# Altium PCB PCB_5_Braco_so_motores.PcbDoc
Units mm, origin at the board's own origin, x right, y up, seen from the top; angles counter-clockwise.
Board outline 97 x 148.5 mm, 2 copper layers (Top Layer, Bottom Layer); 75 components, 78 nets, 227 pads, 19 vias.
Unrouted connection lines stored in the file: 1.
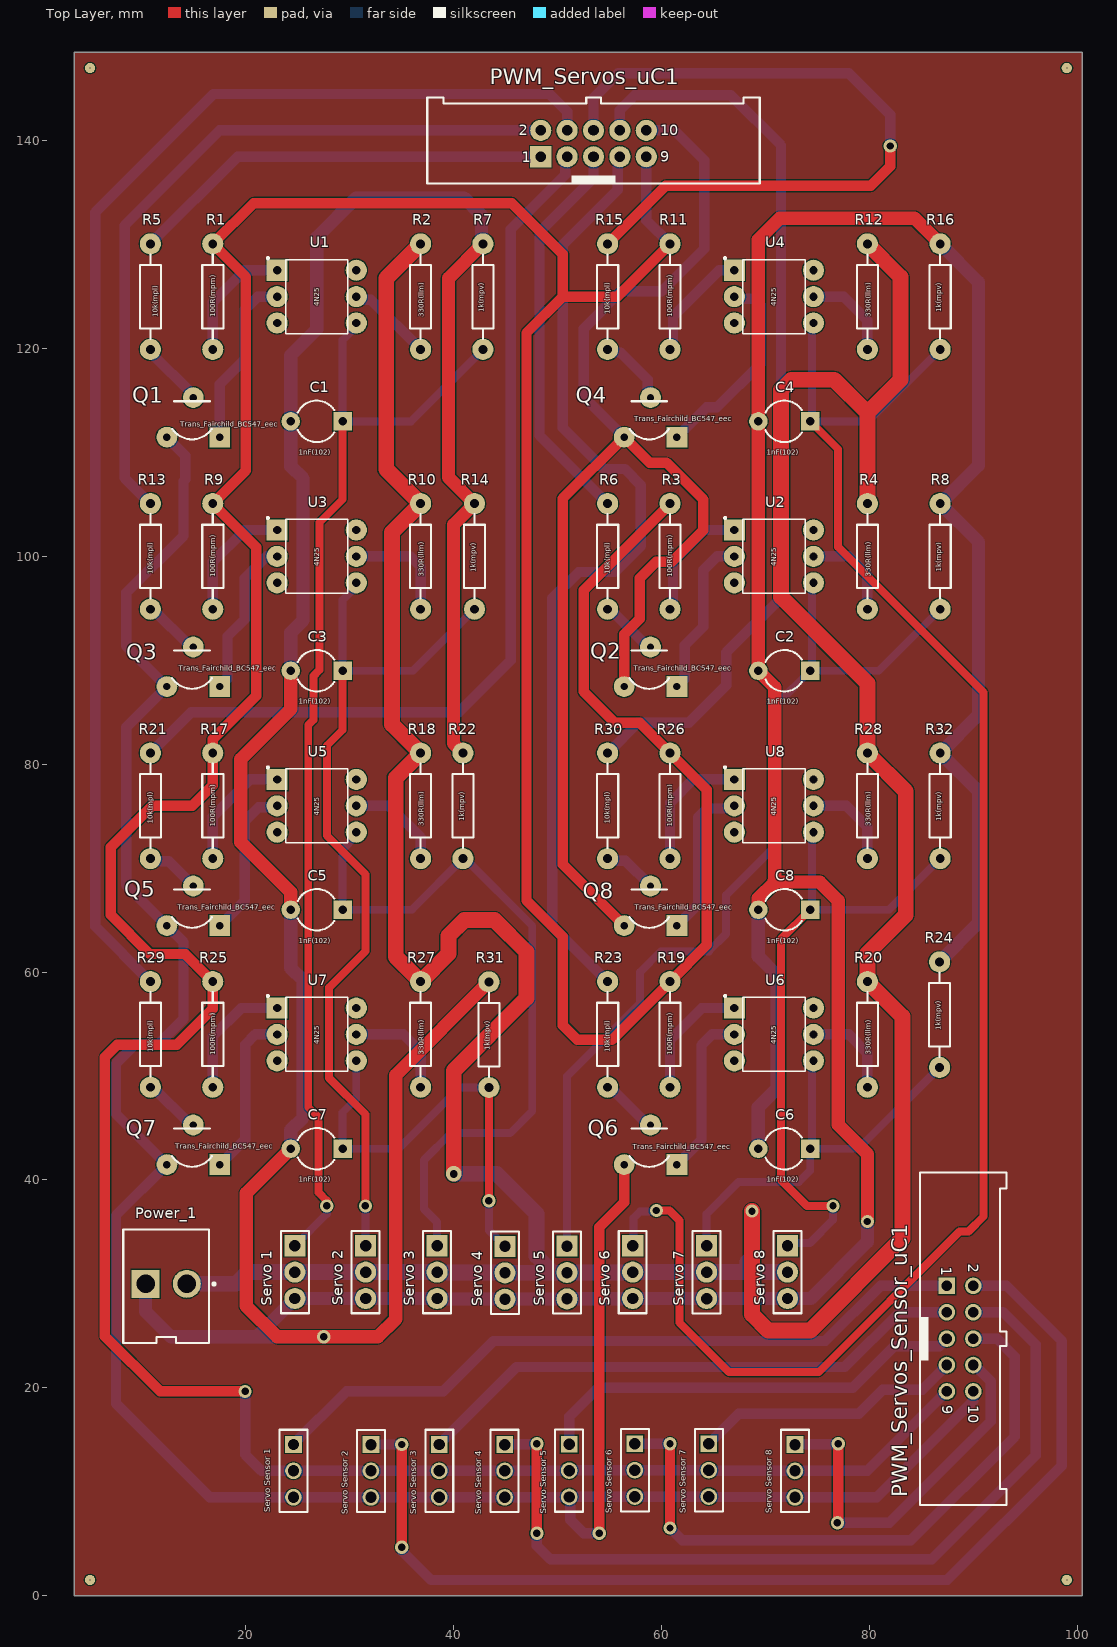
[diagram p0: Top Layer view]
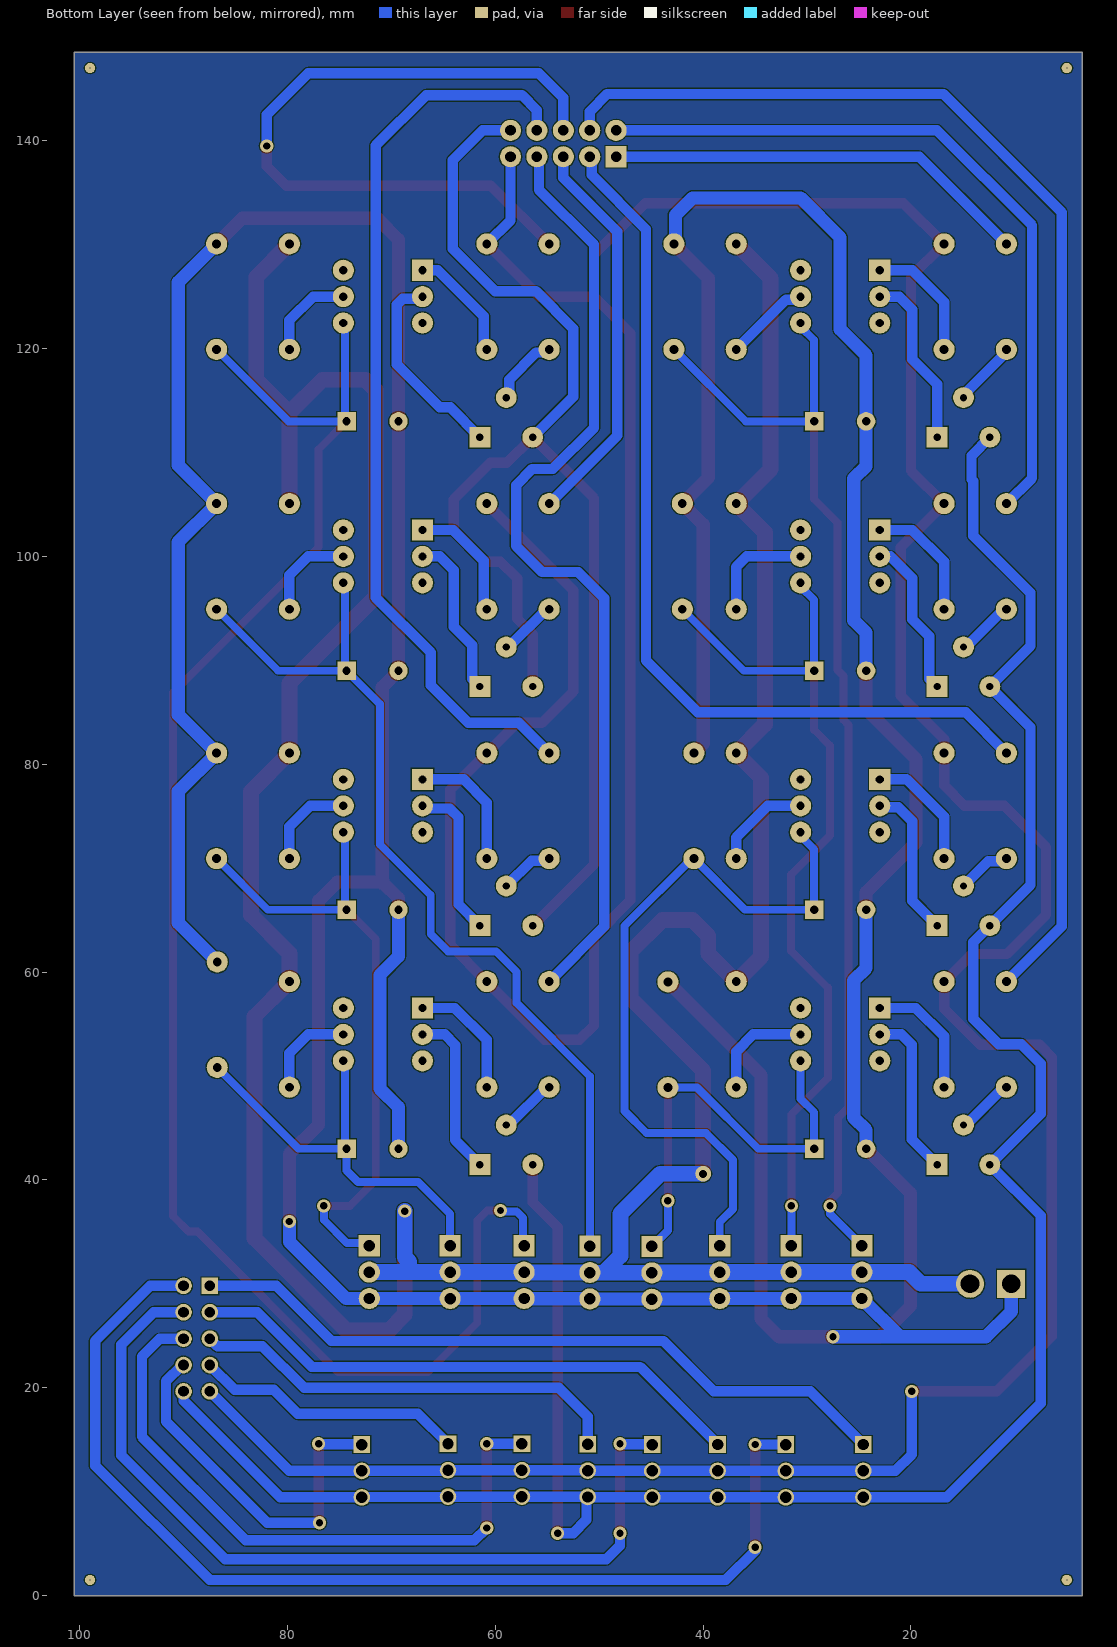
[diagram p1: Bottom Layer view, seen from below]
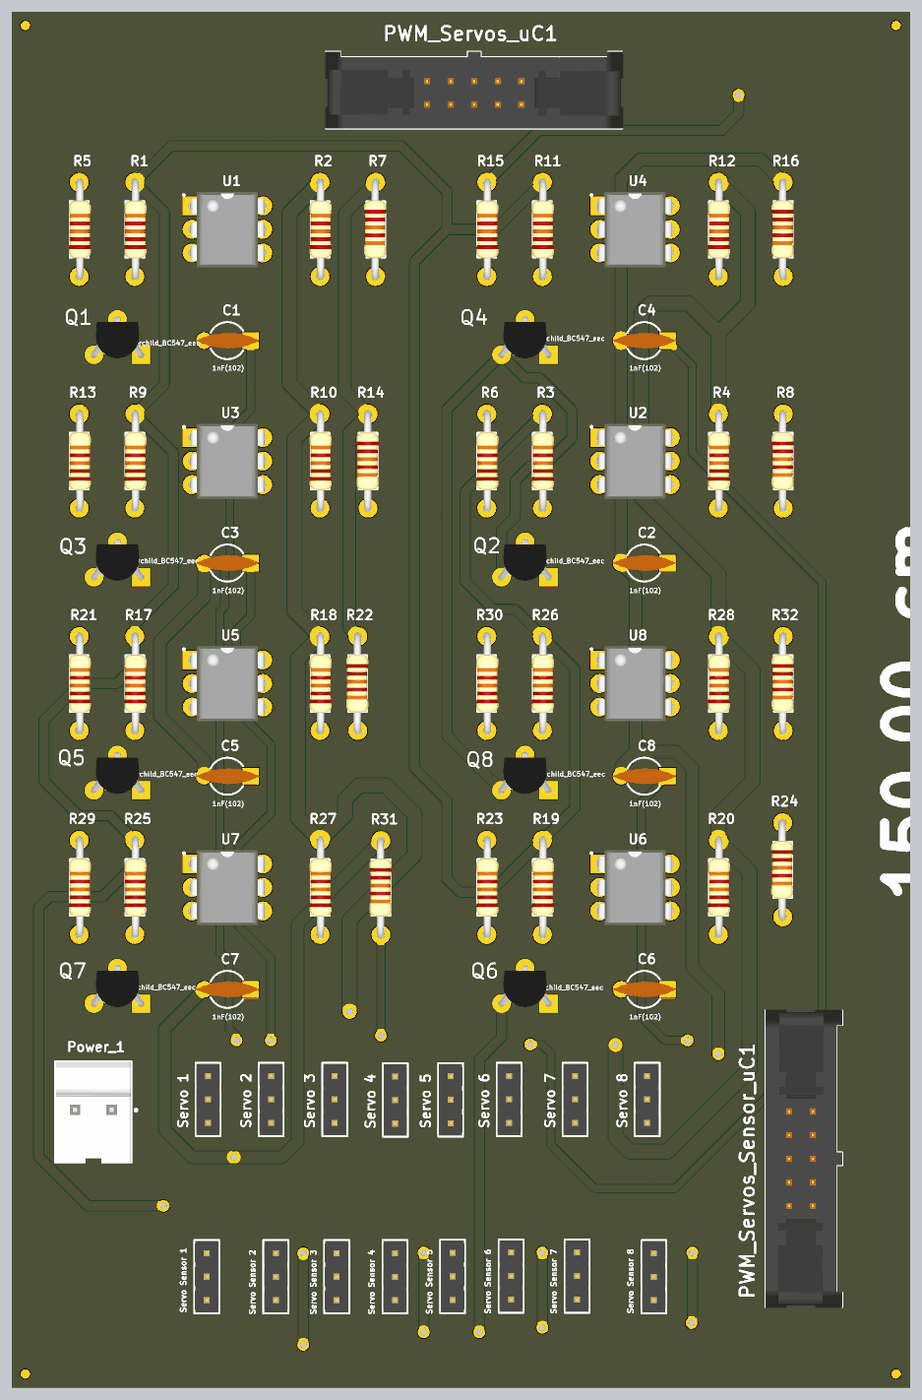
[diagram p2: 3D render of the assembled board from above, using the file's embedded part models]

## Layer stack, top to bottom
Top Solder: solder mask 0.0102, Solder Resist, Dk 3.5
Top Layer: signal copper 0.0356
Dielectric 1: dielectric 0.32, FR-4, Dk 4.8
Bottom Layer: signal copper 0.0356
Bottom Solder: solder mask 0.0102, Solder Resist, Dk 3.5

## Board outline
100.5,148.5 100.5,0 3.5,0 3.5,148.5

## Design rules (kind name [scope] priority, off if disabled: settings)
Clearance [All] p1: gap=0.1 ignorepadtopadclearanceinfootprint=FALSE except(0: Arc-Hole Track-Hole SMDPad-Hole THPad-Hole Via-Hole Fill-Hole Poly-Hole Region-Hole Text-Hole; 0.254: Arc-SMDPad Arc-THPad Arc-Via Arc-Text Track-SMDPad Track-THPad Track-Via Track-Text SMDPad-SMDPad SMDPad-THPad SMDPad-Via SMDPad-Text THPad-THPad THPad-Via THPad-Text Via-Via Via-Text Fill-Text Poly-Text Region-Text Text-Text)
ParallelSegment [All] p1: limit=800.217 gap=0.25
PolygonConnect [All] p1: connectstyle=Relief reliefconductorwidth=0.254 reliefentries=4 polygonreliefangle="90 Angle" airgapwidth=0.254
RoutingCorners [All] p1: cornerstyle=45-Degree minsetback=5.08 maxsetback=2.54
RoutingPriority [OnLayer('Bottom Layer')] p1: routingpriority=6
RoutingVias [All] p1: holewidth=0.711 width=1.57 viastyle="Through Hole" minholewidth=0.711 minwidth=1.27 maxholewidth=0.711 maxwidth=1.67
SolderMaskExpansion [All] p1: expansion=0.102
UnRoutedNet [All] p1: checkbadconnections=TRUE
Width "Schematic Width Constraint_9" [InNet('GND_8V')] p1: maxlimit=1.27 minlimit=1.27 preferedwidth=1.27
Width "Schematic Width Constraint_7" [InNet('Servo_2')] p2: maxlimit=0.762 minlimit=0.762 preferedwidth=0.762
Width "Schematic Width Constraint_6" [InNet('Servo_3')] p3: maxlimit=0.762 minlimit=0.762 preferedwidth=0.762
Width "Schematic Width Constraint_5" [InNet('Servo_4')] p4: maxlimit=0.762 minlimit=0.762 preferedwidth=0.762
Width "Schematic Width Constraint_4" [InNet('Servo_5')] p5: maxlimit=0.762 minlimit=0.762 preferedwidth=0.762
Width "Schematic Width Constraint_3" [InNet('Servo_6')] p6: maxlimit=0.762 minlimit=0.762 preferedwidth=0.762
Width "Schematic Width Constraint_2" [InNet('Servo_8')] p7: maxlimit=0.762 minlimit=0.762 preferedwidth=0.762
Width "Schematic Width Constraint_1" [InNet('Servo_7')] p8: maxlimit=0.762 minlimit=0.762 preferedwidth=0.762
Width "Schematic Width Constraint_8" [InNet('Servo_1')] p9: maxlimit=0.762 minlimit=0.762 preferedwidth=0.762
Width "Schematic Width Constraint" [InNet('VCC_8V')] p10: maxlimit=1.524 minlimit=1.27 preferedwidth=1.524
Width [All] p11: maxlimit=2 minlimit=0.2 preferedwidth=1 minimp=50.000000 maximp=50.000000 favimp=50.000000
27 further rules are at their usual default settings.

## Components (designator, comment, footprint, x,y, rotation, side; value= is the part's Value field where it differs from the comment)
C1 "1nF(102)" CAPR5-4X5 26.814,113 r180 top
C2 "1nF(102)" CAPR5-4X5 71.814,89 r180 top
C3 "1nF(102)" CAPR5-4X5 26.814,89 r180 top
C4 "1nF(102)" CAPR5-4X5 71.814,113 r180 top
C5 "1nF(102)" CAPR5-4X5 26.814,66 r180 top
C6 "1nF(102)" CAPR5-4X5 71.814,43 r180 top
C7 "1nF(102)" CAPR5-4X5 26.814,43 r180 top
C8 "1nF(102)" CAPR5-4X5 71.814,66 r180 top
Power_1 "645002114822" 645002114822 12.334,29.775 r0 top
PWM_Servos_Sensor_uC1 "61201022021" 61201022021#1 88.73,24.725 r270 top
PWM_Servos_uC1 "61201022021" 61201022021#2 53.453,139.73 r0 top
Q1 "Trans_Fairchild_BC547_eec" Fairchild_BC547_0 14.814,113 r90 top
Q2 "Trans_Fairchild_BC547_eec" Fairchild_BC547_0 58.814,89 r90 top
Q3 "Trans_Fairchild_BC547_eec" Fairchild_BC547_0 14.814,89 r90 top
Q4 "Trans_Fairchild_BC547_eec" Fairchild_BC547_0 58.814,113 r90 top
Q5 "Trans_Fairchild_BC547_eec" Fairchild_BC547_0 14.814,66 r90 top
Q6 "Trans_Fairchild_BC547_eec" Fairchild_BC547_0 58.814,43 r90 top
Q7 "Trans_Fairchild_BC547_eec" Fairchild_BC547_0 14.814,43 r90 top
Q8 "Trans_Fairchild_BC547_eec" Fairchild_BC547_0 58.814,66 r90 top
R1 "100R(mpm)" AXIAL-0.4 16.814,125 r90 top
R2 "330R(llm)" AXIAL-0.4 36.814,125 r90 top value="10K (mpl)"
R3 "100R(mpm)" AXIAL-0.4 60.814,100 r90 top
R4 "330R(llm)" AXIAL-0.4 79.814,100 r90 top
R5 "10k(mpl)" AXIAL-0.4 10.814,125 r90 top
R6 "10k(mpl)" AXIAL-0.4 54.814,100 r90 top
R7 "1k(mpv)" AXIAL-0.4 42.814,125 r270 top
R8 "1k(mpv)" AXIAL-0.4 86.814,100 r270 top
R9 "100R(mpm)" AXIAL-0.4 16.814,100 r90 top
R10 "330R(llm)" AXIAL-0.4 36.814,100 r90 top
R11 "100R(mpm)" AXIAL-0.4 60.814,125 r90 top
R12 "330R(llm)" AXIAL-0.4 79.814,125 r90 top
R13 "10k(mpl)" AXIAL-0.4 10.814,100 r90 top
R14 "1k(mpv)" AXIAL-0.4 42,100 r270 top
R15 "10k(mpl)" AXIAL-0.4 54.814,125 r90 top
R16 "1k(mpv)" AXIAL-0.4 86.814,125 r270 top
R17 "100R(mpm)" AXIAL-0.4 16.814,76 r90 top
R18 "330R(llm)" AXIAL-0.4 36.814,76 r90 top
R19 "100R(mpm)" AXIAL-0.4 60.814,54 r90 top
R20 "330R(llm)" AXIAL-0.4 79.814,54 r90 top
R21 "10k(mpl)" AXIAL-0.4 10.814,76 r90 top
R22 "1k(mpv)" AXIAL-0.4 40.888,76 r270 top
R23 "10k(mpl)" AXIAL-0.4 54.814,54 r90 top
R24 "1k(mpv)" AXIAL-0.4 86.756,55.902 r270 top
R25 "100R(mpm)" AXIAL-0.4 16.814,54 r90 top
R26 "100R(mpm)" AXIAL-0.4 60.814,76 r90 top
R27 "330R(llm)" AXIAL-0.4 36.814,54 r90 top
R28 "330R(llm)" AXIAL-0.4 79.814,76 r90 top
R29 "10k(mpl)" AXIAL-0.4 10.814,54 r90 top
R30 "10k(mpl)" AXIAL-0.4 54.814,76 r90 top
R31 "1k(mpv)" AXIAL-0.4 43.388,53.976 r270 top
R32 "1k(mpv)" AXIAL-0.4 86.814,76 r270 top
"Servo 1" "61300311121" 61300311121#1 24.718,31.125 r270 top
"Servo 2" "61300311121" 61300311121#1 31.527,31.125 r270 top
"Servo 3" "61300311121" 61300311121#1 38.4,31.125 r270 top
"Servo 4" "61300311121" 61300311121#1 44.933,31.059 r270 top
"Servo 5" "61300311121" 61300311121#1 50.899,31.086 r270 top
"Servo 6" "61300311121" 61300311121#1 57.223,31.125 r270 top
"Servo 7" "61300311121" 61300311121#1 64.34,31.124 r270 top
"Servo 8" "61300311121" 61300311121#1 72.124,31.125 r270 top
"Servo Sensor 1" "61300311121" 61300311121#2 24.581,12 r270 top
"Servo Sensor 2" "61300311121" 61300311121#2 32.037,11.994 r270 top
"Servo Sensor 3" "61300311121" 61300311121#2 38.61,12 r270 top
"Servo Sensor 4" "61300311121" 61300311121#2 44.898,11.994 r270 top
"Servo Sensor 5" "61300311121" 61300311121#2 51.109,12.028 r270 top
"Servo Sensor 6" "61300311121" 61300311121#2 57.433,12.067 r270 top
"Servo Sensor 7" "61300311121" 61300311121#2 64.55,12.066 r270 top
"Servo Sensor 8" "61300311121" 61300311121#2 72.841,11.994 r270 top
U1 "4N25" *DIP762W50P254L712H400Q6N 26.814,125 r0 top
U2 "4N25" *DIP762W50P254L712H400Q6N 70.814,100 r0 top
U3 "4N25" *DIP762W50P254L712H400Q6N 26.814,100 r0 top
U4 "4N25" *DIP762W50P254L712H400Q6N 70.814,125 r0 top
U5 "4N25" *DIP762W50P254L712H400Q6N 26.814,76 r0 top
U6 "4N25" *DIP762W50P254L712H400Q6N 70.814,54 r0 top
U7 "4N25" *DIP762W50P254L712H400Q6N 26.814,54 r0 top
U8 "4N25" *DIP762W50P254L712H400Q6N 70.814,76 r0 top

## Footprints (in the part's own frame and the unit in brackets; to place one, negate y for a bottom-side part, rotate by r counter-clockwise, add the part's x,y. Pads: shape width x height; smd on the part's side, far side on the other; paste and mask are expansions set on the pad)
61201022021#1 [mm] "10 pins, straight, short lever, gold plating"
  rect 1.6x1.6 hole 1.02: 1(-5.08,-1.27)
  round 1.6 hole 1.02: 2(-5.08,1.27) 3(-2.54,-1.27) 4(-2.54,1.27) 5(0,-1.27) 6(0,1.27) 7(2.54,-1.27) 8(2.54,1.27) 9(5.08,-1.27) 10(5.08,1.27)
  silkscreen extent -16,-3.85 16,4.45, body extent -16.1,-3.85 16.1,4.45, height 24.55
61201022021#2 [mm] "10 pins, straight, short lever, gold plating"
  rect 2.032x2.032 hole 1.02: 1(-5.08,-1.27)
  round 2.032 hole 1.02: 2(-5.08,1.27) 3(-2.54,-1.27) 4(-2.54,1.27) 5(0,-1.27) 6(0,1.27) 7(2.54,-1.27) 8(2.54,1.27) 9(5.08,-1.27) 10(5.08,1.27)
  silkscreen extent -16,-3.85 16,4.45, body extent -16.1,-3.85 16.1,4.45, height 24.55
61300311121#1 [mil] "Pin Header, pitch 2.54 mm, THT, Vertical, single row, 3p"
  rect 80x80 hole 43.31: 1(-100,0)
  round 80 hole 43.31: 2(0,0) 3(100,0)
  silkscreen extent -156,-53 156,53, body extent -150,-50 150,50, height 337
61300311121#2 [mil] "Pin Header, pitch 2.54 mm, THT, Vertical, single row, 3p"
  rect 62.99x62.99 hole 43.31: 1(-100,0)
  round 62.99 hole 43.31: 2(0,0) 3(100,0)
  silkscreen extent -156,-53 156,53, body extent -150,-50 150,50, height 337
645002114822 [mm] "3.96mm Male Locking Header, 2p"
  round 2.7 hole 1.8: 1(1.98,0.225)
  rect 2.7x2.7 hole 1.8: 2(-1.98,0.225)
  silkscreen extent -4.14,-5.45 4.72,5.45, body extent -4.01,-5.37 4.01,5.38, height 13.89
*DIP762W50P254L712H400Q6N [mil]
  rect 80x80 hole 31.5: 1(-150,100)
  round 80 hole 31.5: 2(-150,0) 3(-150,-100) 4(150,-100) 5(150,0) 6(150,100)
  silkscreen extent -189,-140 118,150, body extent -157,-160 157,158, height 180
AXIAL-0.4 [mil] "Axial Device, Thru-Hole; 2 Leads; 0.4 in Pin Spacing"
  round 80 hole 33.46: 1(-200,0) 2(200,0)
  silkscreen extent -160,-40 160,40, body extent -213,-49 213,45, height 142
CAPR5-4X5 [mil] "Capacitor; 2 Leads"
  rect 70x70 hole 31.5: 1(-98.43,0)
  round 70 hole 31.5: 2(98.42,0)
  silkscreen extent -66,-79 72,79, body extent -138,-33 138,33, height 335
Fairchild_BC547_0 [mm]
  rect 2x2 hole 0.71 paste-1000 mask+0: 1(-1.524,-2.667)
  round 2 hole 0.71 paste-1000 mask+0: 2(2.286,-0.127) 3(-1.524,2.413)
  silkscreen extent -1.74,-1.9 1.93,1.9, body extent -1.91,-2.92 8,2.67, height 10.54

## Part data
C1 C2 C3 C4 C5 C6 C7 C8: library part Cap2, "Capacitor", PackageDescription="Capacitor; 2 Leads", PackageReference=CAPR5-4X5, Published=23-Sep-2002, Publisher="Altium Limited"
Power_1: "WR-WTB THT Male Vertical Locking Header, pitch 3.96mm, 2p", Contact Resistance=20mOhm, Operating Temperature="-40 to +105degC", Rated Current=7A, Withstanding Voltage=1500VAC, Working Voltage=250VAC, ComponentLink1Description=Manufacturer, ComponentLink1URL=http://www.we-online.de, ComponentLink2Description=Datasheet, ComponentLink2URL=https://www.we-online.com/catalog/datasheet/645002114822.pdf, Gender=Male, Mounting Technology=THT, Packaging=Bag, Part Number=645002114822, Pin Number=2, Pitch=3.96mm, Published Date="January 2020", Publisher="Wurth Elektronik", Type=Vertical
PWM_Servos_Sensor_uC1 PWM_Servos_uC1: "Male Box Header WR-BHD with lever, THT, Vertical, pitch 2.54 mm, 10 pins", Contact Resistance="20 mOhm", Operating Temperature="-40 to 125 degC", Withstanding Voltage="500 VAC", Working Voltage="250 VAC", ComponentLink1Description=Manufacturer, ComponentLink1URL=http://www.we-online.de, ComponentLink2Description=Datasheet, ComponentLink2URL=https://katalog.we-online.de/em/datasheet/6120xx22021.pdf, Gender=Male, Mounting Technology=THT, Orientation=Vertical, Packaging=Tray, Part Number=61201022021, Pin Number=10, Pitch="2.54 mm", Published Date="August 2018", Publisher="Wurth Elektronik"
Q1 Q2 Q3 Q4 Q5 Q6 Q7 Q8: "TRANS NPN 45V 0.1A TO-92", Digikey Part Number=BC547-ND, Manufacturer=Fairchild, Mouser Part Number=512-BC547, Package=TO-92, Part Number=BC547, Power=500mW, Temperature="-65°C to +150°C", Temperature Range High=+150°C, Temperature Range Low=-65°C, ComponentLink1Description=Upverter, ComponentLink1URL=https://upverter.com/upn/revision/b6c8bf2a31a37ee3/, ComponentLink2Description=Datasheet, ComponentLink2URL=https://upverter.com/datasheet/00a4bcea94b7f6a06c7169869aec7b7ac700d7c3.pdf, Digikey Description="TRANS NPN 45V 0.1A TO-92", helpURL=https://upverter.com/upn/revision/b6c8bf2a31a37ee3/, Ipc Land Pattern Name=TO-92, Lead Free=yes, RoHS=TRUE, Supplier 1=Digi-Key, Supplier 2=Mouser, Supplier Part Number 1=BC547-ND, Supplier Part Number 2=512-BC547
R1 R2 R3 R4 R5 R6 R7 R8 R9 R10 R11 R12 R13 R14 R15 R16 R17 R18 R19 R20 R21 R22 R23 R24 R25 R26 R27 R28 R29 R30 R31 R32: library part Res2, "Resistor", LatestRevisionDate=17-Jul-2002, LatestRevisionNote="Re-released for DXP Platform.", PackageDescription="Axial Device, Thru-Hole; 2 Leads; 0.4 in Pin Spacing", PackageReference=AXIAL-0.4, Published=8-Jun-2000, Publisher="Altium Limited"
"Servo 1" "Servo 2" "Servo 3" "Servo 4" "Servo 5" "Servo 6" "Servo 7" "Servo 8" "Servo Sensor 1" "Servo Sensor 2" "Servo Sensor 3" "Servo Sensor 4" "Servo Sensor 5" "Servo Sensor 6" "Servo Sensor 7" "Servo Sensor 8": "WR-PHD Pin Header, THT, pitch 2.54mm, Single Row, Vertical, 3pin", Contact Resistance=20mOhm, Operating Temperature="-40 to +105degC", Rated Current=3A, Withstanding Voltage=500VAC, Working Voltage=250VAC, ComponentLink1Description=Manufacturer, ComponentLink1URL=http://www.we-online.de, ComponentLink2Description=Datasheet, ComponentLink2URL=https://katalog.we-online.de/em/datasheet/6130xx11121.pdf, Gender=Male, Mounting Technology=THT, Orientation=Vertical, Packaging=Bag, Part Number=61300311121, Pin Number=3, Pitch=2.54mm, Published Date="June 2019", Publisher="Wurth Elektronik", Row Number=Single
U1 U2 U3 U4 U5 U6 U7 U8: "Optoisolator Transistor with Base Output 5000Vrms 1 Channel 6-DIP", Package="DIP-6 Lite-On", Digi-Key_Part_Number=4N25VS-ND, Digi-Key_Purchase_URL=https://www.digikey.com/product-detail/en/vishay-semiconductor-opto-division/4N25/4N25VS-ND/1738516?utm_source=snapeda&utm_medium=aggregator&utm_campaign=symbol, MF="Vishay Semiconductor", MP=4N25, SnapEDA_Link=https://www.snapeda.com/parts/4N25/Vishay%20Semiconductor%20Opto%20Division/view-part/641454/?ref=snap

## Free pads (board coordinates)
  round 1 hole 0.1: 1(5,1.5) 1(5,147) 1(99,1.5) 1(99,147)
  round 1.524 hole 0.762: 2(40,40.587)

## Via types
v1: diameter 1.27, hole 0.711, Top Layer to Bottom Layer, 19 vias

## Nets (pads, with @x,y where several pads share a name; then routed paths per layer and width w, separated by ;. In a path a pad name is that pad's centre, name@x,y a point inside that pad or via, vN(x,y) a via of type N, cw(c..) or ccw(c..) an arc to the next point about the centre after c; other vN are vias at no path point)
3V3_uC: 
"ADD 1": 
"ADD 2": 
"ADD 3": 
"ADD 4": 
"ADD 5": 
"ADD 6": 
DBG0: 
DBG1: 
DBG2: 
"GND (SENSOR)": 
GND_8V: "Servo 1.3" "Servo 2.3" "Servo 3.3" "Servo 4.3" "Servo 5.3" "Servo 6.3" "Servo 7.3" "Servo 8.3" C1.2 C2.2 C3.2 C4.2 C5.2 C6.2 C7.2 C8.2 Power_1.2 R7.1 R8.1 R14.1 R16.1 R22.1 R24.1 R31.1 R32.1 | length 550.5
  Top Layer w1.27: C7.2 20.044,38.73 20.044,27.856 23,24.9 v1(27.5,24.9) 32.712,24.9 34.417,26.605 34.417,50.085 R31.1 ; C5.2 24.314,67.686 19.5,72.5 19.5,80.5 24.314,85.314 C3.2 ; 24.572,28.731 24.718,28.585 ; R22.1 39.98,81.988 39.98,103.06 R14.1 39.5,107.58 39.5,126.766 R7.1 ; C8.2 69.314,67.095 70.826,68.607 ; v1(79.814,36) 79.814,42.5 77,45.313 77,66.884 75.217,68.667 70.885,68.667 ; R16.1 84.356,132.537 71.374,132.537 69.314,130.477 C4.2 C2.2 70.885,87.428 70.885,68.667 ; 70.826,68.607 70.885,68.548 70.885,68.667 ; 70.826,68.607 70.766,68.667 70.885,68.667 ; 70.826,68.607 70.885,68.667
  Bottom Layer w1.27: Power_1.2 10.354,27.327 12.781,24.9 21.033,24.9 ; C7.2 24.313,44.813 25.5,46 25.5,59.197 24.314,60.383 C5.2 ; C3.2 24.314,92.66 25.5,93.847 25.5,107.5 24.314,108.686 C1.2 24.314,119.348 26.814,121.848 26.814,130.69 30.624,134.5 41,134.5 42.668,132.832 42.668,130.226 R7.1 ; v1(27.5,24.9) 21.033,24.9 ; 31.527,28.585 24.718,28.585 21.033,24.9 ; 31.527,28.585 38.4,28.585 38.433,28.552 44.899,28.552 44.933,28.519 44.946,28.532 50.886,28.532 50.899,28.546 50.919,28.566 57.204,28.566 57.223,28.585 64.34,28.585 ; 64.341,28.585 72.123,28.585 74.36,28.585 79.814,34.038 v1(79.814,36) ; C6.2 69.314,47 71.106,48.793 71.106,59.72 69.314,61.512 C8.2 ; R24.1 90.5,64.725 90.5,77.393 R32.1 90.5,84.767 90.5,101.393 R8.1 90.5,108.767 90.5,126.393 R16.1
GND_uC: "Servo Sensor 1.3" "Servo Sensor 2.3" "Servo Sensor 3.3" "Servo Sensor 4.3" "Servo Sensor 5.3" "Servo Sensor 6.3" "Servo Sensor 7.3" "Servo Sensor 8.3" PWM_Servos_Sensor_uC1.10 PWM_Servos_uC1.10 Q1.3 Q2.3 Q3.3 Q4.3 Q5.3 Q6.3 Q7.3 Q8.3 | length 368.8
  Top Layer w1: v1(54,6) 54,35.44 56.4,37.84 Q6.3 ; Q8.3 50.5,70.377 50.5,105.576 Q4.3 58.877,109 60.48,109 64,105.48 64,102.5 61,99.5 59.5,99.5 57.894,97.894 57.894,94 56.4,92.507 Q2.3
  Bottom Layer w1: Q1.3 14.168,109.708 14.168,107.401 14,107.232 14,102 8.5,96.5 8.5,91.377 Q3.3 8.5,83.575 8.5,68.377 Q5.3 14,62.877 14,55.5 11.561,53.061 9.365,53.061 7.5,51.196 7.5,46.377 Q7.3 7.5,36.575 7.5,18.5 16.54,9.46 24.581,9.46 24.584,9.457 32.034,9.457 32.037,9.454 32.04,9.457 38.607,9.457 38.61,9.46 38.616,9.454 44.898,9.454 44.915,9.471 51.092,9.471 51.109,9.488 ; v1(54,6) 52.5,6 51.224,7.276 51.224,9.373 51.109,9.488 ; Q4.3 52.5,115.377 52.5,121.922 56.078,125.5 60,125.5 64.11,129.61 64.11,138.12 61.23,141 PWM_Servos_uC1.10 ; PWM_Servos_Sensor_uC1.10 90,18.763 80.691,9.454 72.841,9.454 72.805,9.49 64.586,9.49 64.55,9.526 57.433,9.526 57.414,9.508 51.128,9.508 51.109,9.488
I2C1-SCL: 
I2C1-SDA: 
I2C2-SCL: 
I2C2-SDA: 
I2C3-SCL: 
I2C3-SDA: 
NetQ1_1: Q1.1 U1.2 | length 16.9
  Bottom Layer w1: Q1.1 17.481,116.563 19.885,118.967 19.885,123.761 21.124,125 U1.2
NetQ1_2: Q1.2 R5.1 | length 6.3
  Bottom Layer w1: R5.1 10.813,119.667 14.941,115.54 Q1.2
NetQ2_1: Q2.1 U2.2 | length 15.8
  Bottom Layer w1: Q2.1 62.231,88.226 62.231,91.454 64,93.223 64,98.66 65.34,100 U2.2
NetQ2_2: Q2.2 R6.1 | length 5.6
  Bottom Layer w1: R6.1 55.06,94.92 58.694,91.286 Q2.2
NetQ3_1: Q3.1 U3.2 | length 15.4
  Bottom Layer w1: Q3.1 18.231,88.226 18.231,92.308 19.885,93.962 19.885,97.885 22,100 U3.2
NetQ3_2: Q3.2 R13.1 | length 5.6
  Bottom Layer w1: R13.1 11.06,94.92 14.694,91.286 Q3.2
NetQ4_1: Q4.1 U4.2 | length 19.5
  Bottom Layer w1: Q4.1 64.34,114.336 65.336,114.336 69.5,118.5 69.5,124.217 68.914,124.803 67.201,124.803 U4.2
NetQ4_2: Q4.2 R15.1 | length 6.9
  Bottom Layer w1: R15.1 55.107,119.627 56.044,119.627 58.653,117.017 58.653,115.573 Q4.2
NetQ5_1: Q5.1 U5.2 | length 14.8
  Bottom Layer w1: Q5.1 19.885,66.88 19.885,74.498 21.238,75.851 22.855,75.851 U5.2
NetQ5_2: Q5.2 R21.1 | length 5.2
  Bottom Layer w1: R21.1 11.087,70.647 12.58,70.647 Q5.2
NetQ6_1: Q6.1 U6.2 | length 16.1
  Bottom Layer w1: Q6.1 63.84,43.836 63.84,52.973 64.867,54 U6.2
NetQ6_2: Q6.2 R23.1 | length 5.6
  Bottom Layer w1: R23.1 55.06,48.92 58.694,45.286 Q6.2
NetQ7_1: Q7.1 U7.2 | length 16
  Bottom Layer w1: Q7.1 19.925,43.92 19.925,53 20.925,54 U7.2
NetQ7_2: Q7.2 R29.1 | length 5.6
  Bottom Layer w1: R29.1 11.06,48.92 14.694,45.286 Q7.2
NetQ8_1: Q8.1 U8.2 | length 15.2
  Bottom Layer w1: Q8.1 63.54,66.536 63.54,74.906 64.372,75.739 66.742,75.739 U8.2
NetQ8_2: Q8.2 R30.1 | length 5.2
  Bottom Layer w1: R30.1 55.011,70.723 56.504,70.723 Q8.2
NetR1_1: R1.1 U1.1 | length 12
  Bottom Layer w1: R1.1 16.814,124.469 19.885,127.54 U1.1
NetR2_1: R2.1 U1.5 | length 8.3
  Bottom Layer w1: U1.5 30.917,124.707 32.027,124.707 R2.1
NetR3_1: R3.1 U2.1 | length 11.9
  Bottom Layer w1: R3.1 61.107,95.213 61.107,99.607 64.04,102.54 U2.1
NetR4_1: R4.1 U2.5 | length 9.2
  Bottom Layer w1: U2.5 78,100 79.814,98.186 R4.1
NetR9_1: R9.1 U3.1 | length 12
  Bottom Layer w1: R9.1 16.814,99.469 19.885,102.54 U3.1
NetR10_1: R10.1 U3.5 | length 10.7
  Bottom Layer w1: U3.5 35.797,100 36.813,98.984 R10.1
NetR11_1: R11.1 U4.1 | length 11
  Bottom Layer w1: R11.1 61.107,120.213 61.107,123.107 65.54,127.54 U4.1
NetR12_1: R12.1 U4.5 | length 8.9
  Bottom Layer w1: U4.5 77.527,125 79.814,122.714 R12.1
NetR17_1: R17.1 U5.1 | length 11.7
  Bottom Layer w1: R17.1 16.814,74.929 20.425,78.54 U5.1
NetR18_1: R18.1 U5.5 | length 9.5
  Bottom Layer w1: U5.5 33.766,76 36.814,72.952 R18.1
NetR19_1: R19.1 U6.1 | length 12
  Bottom Layer w1: R19.1 60.814,53.473 63.88,56.54 U6.1
NetR20_1: R20.1 U6.5 | length 9.2
  Bottom Layer w1: U6.5 78,54 79.814,52.186 R20.1
NetR25_1: R25.1 U7.1 | length 12.2
  Bottom Layer w1: R25.1 16.814,53.814 19.54,56.54 U7.1
NetR26_1: R26.1 U8.1 | length 12.5
  Bottom Layer w1: R26.1 60.814,76.304 63.05,78.54 U8.1
NetR27_1: R27.1 U7.5 | length 10.3
  Bottom Layer w1: U7.5 35.167,54 36.814,52.353 R27.1
NetR28_1: R28.1 U8.5 | length 9.1
  Bottom Layer w1: U8.5 77.798,76 79.814,73.984 R28.1
PWM_Servo_1: PWM_Servos_uC1.1 R5.2 | length 41
  Bottom Layer w1: R5.2 19.194,138.46 PWM_Servos_uC1.1
PWM_Servo_2: PWM_Servos_uC1.2 R13.2 | length 71.6
  Bottom Layer w1: R13.2 8.348,107.546 8.348,131.848 17.5,141 PWM_Servos_uC1.2
PWM_Servo_3: PWM_Servos_uC1.3 R21.2 | length 89.1
  Bottom Layer w1: R21.2 14.734,85 40.5,85 45.5,90 45.5,131.5 50.716,136.716 50.716,138.263 PWM_Servos_uC1.3
PWM_Servo_4: PWM_Servos_uC1.4 R29.2 | length 128.9
  Bottom Layer w1: R29.2 5.5,64.394 5.5,133.099 16.901,144.5 49.216,144.5 50.913,142.803 PWM_Servos_uC1.4
PWM_Servo_5: PWM_Servos_uC1.5 R6.2 | length 38.2
  Bottom Layer w1: PWM_Servos_uC1.5 53.453,136.453 48.26,131.26 48.26,111.634 R6.2
PWM_Servo_6: PWM_Servos_uC1.6 R15.2 | length 69.6
  Top Layer w1: R15.2 60.414,135.68 80.136,135.68 82,137.544 v1(82,139.5)
  Bottom Layer w1: PWM_Servos_uC1.6 53.453,144.14 55.814,146.5 78,146.5 82,142.5 v1(82,139.5)
PWM_Servo_7: PWM_Servos_uC1.7 R23.2 | length 93.7
  Bottom Layer w1: R23.2 49.5,64.394 49.5,95.989 52.011,98.5 55.5,98.5 58,101 58,106.855 56.441,108.414 54.456,108.414 50.5,112.371 50.5,130 55.796,135.296 55.796,138.263 PWM_Servos_uC1.7
PWM_Servo_8: PWM_Servos_uC1.8 R30.2 | length 88.3
  Bottom Layer w1: R30.2 57.734,84 62.61,84 66.214,87.604 66.214,90.758 71.5,96.045 71.5,139.544 66.664,144.38 57.427,144.38 55.993,142.946 PWM_Servos_uC1.8
Sensor_Servo_1: "Servo Sensor 1.1" PWM_Servos_Sensor_uC1.1 | length 69.2
  Bottom Layer w1: 24.581,14.54 29.686,19.645 39,19.645 43.855,24.5 75.775,24.5 81.08,29.805 PWM_Servos_Sensor_uC1.1
Sensor_Servo_2: "Servo Sensor 2.1" PWM_Servos_Sensor_uC1.2 | length 105.1
  Top Layer w1: v1(35,4.655) v1(35,14.534)
  Bottom Layer w1: 32.037,14.534 v1(35,14.534) ; v1(35,4.655) 35,4.31 37.81,1.5 87.5,1.5 98.5,12.5 98.5,24.5 93.195,29.805 PWM_Servos_Sensor_uC1.2
Sensor_Servo_3: "Servo Sensor 3.1" PWM_Servos_Sensor_uC1.3 | length 54.1
  Bottom Layer w1: 38.61,14.54 46.07,22 77.646,22 82.911,27.265 PWM_Servos_Sensor_uC1.3
Sensor_Servo_4: "Servo Sensor 4.1" PWM_Servos_Sensor_uC1.4 | length 83.5
  Top Layer w1: v1(48,6) v1(48,14.607)
  Bottom Layer w1: 44.898,14.534 44.934,14.57 47.963,14.57 v1(48,14.607) ; v1(48,6) 48,4.81 49.31,3.5 86,3.5 96,13.5 96,24.125 92.86,27.265 PWM_Servos_Sensor_uC1.4
Sensor_Servo_5: "Servo Sensor 5.1" PWM_Servos_Sensor_uC1.5 | length 42.1
  Bottom Layer w1: 51.109,14.568 51.109,17.224 53.886,20 78.403,20 82.402,24 86.735,24 PWM_Servos_Sensor_uC1.5
Sensor_Servo_6: "Servo Sensor 6.1" PWM_Servos_Sensor_uC1.6 | length 61.7
  Top Layer w1: v1(60.813,6.5) v1(60.814,14.607)
  Bottom Layer w1: 57.433,14.607 v1(60.814,14.607) ; v1(60.813,6.5) 62.003,5.31 84.003,5.31 94,15.307 94,23 92.3,24.7 90.025,24.7 PWM_Servos_Sensor_uC1.6
Sensor_Servo_7: "Servo Sensor 7.1" PWM_Servos_Sensor_uC1.7 | length 26
  Bottom Layer w1: 64.55,14.606 67.444,17.5 79,17.5 81.303,19.803 85.078,19.803 PWM_Servos_Sensor_uC1.7
Sensor_Servo_8: "Servo Sensor 8.1" PWM_Servos_Sensor_uC1.8 | length 36.8
  Top Layer w1: v1(76.921,7) 77,7.079 v1(77,14.607)
  Bottom Layer w1: 72.841,14.534 72.878,14.57 76.964,14.57 v1(77,14.607) ; v1(76.921,7) 81.933,7 91.693,16.76 91.693,20.625 90.133,22.185 PWM_Servos_Sensor_uC1.8
Servo_1: "Servo 1.1" C1.1 R7.2 U1.4 | length 109.1
  Top Layer w0.762: v1(27.788,37.5) 27.788,38 27,38.788 27,46 26,47 26,83.776 26.5,84.276 26.5,88.5 27.064,89.064 27.064,103.25 29.314,105.5 C1.1
  Bottom Layer w0.762: 24.718,33.665 27.788,36.735 v1(27.788,37.5) ; U1.4 30.624,122.116 29.314,120.806 C1.1 35.894,113 R7.2
Servo_2: "Servo 2.1" C3.1 R14.2 U3.4 | length 84.6
  Top Layer w0.762: C3.1 29.314,83.314 27.788,81.788 27.788,73.132 31.527,69.393 31.527,62.027 28,58.5 28,49.814 31.5,46.314 v1(31.5,37.5)
  Bottom Layer w0.762: U3.4 30.624,97.116 29.314,95.806 C3.1 36.08,89 R14.2 ; v1(31.5,37.5) 31.5,33.692 31.527,33.665
Servo_3: "Servo 3.1" C5.1 R22.2 U5.4 | length 70
  Bottom Layer w0.762: U5.4 30.624,73.116 29.314,71.806 C5.1 35.968,66 40.984,71.016 47.554,64.446 47.554,46.621 45.433,44.5 39.721,44.5 37.13,41.909 37.13,37.21 38.4,35.94 38.4,33.665
Servo_4: "Servo 4.1" C7.1 R31.2 U7.4 | length 41.5
  Top Layer w0.762: v1(43.388,38) R31.2
  Bottom Layer w0.762: U7.4 30.624,47.81 29.314,46.5 C7.1 34.687,43 40.583,48.896 R31.2 ; v1(43.388,38) 43.388,35.144 44.933,33.599
Servo_5: "Servo 5.1" C2.1 R8.2 U2.4 | length 91.3
  Bottom Layer w0.762: 50.899,33.626 50.899,49.973 57.945,57.018 57.945,60.016 59.928,62 64.55,62 66.214,63.663 66.214,67.4 71.106,72.293 71.106,85.793 C2.1 ; U2.4 74.469,97.305 74.469,89.155 C2.1 ; R8.2 80.894,89 C2.1
Servo_6: "Servo 6.1" C4.1 R16.2 U4.4 | length 163.5
  Top Layer w0.762: v1(59.5,37.054) 60.775,37.054 61.736,36.094 61.736,26.264 66.5,21.5 75.131,21.5 88.661,35.03 89.53,35.03 91,36.5 91,86.902 77,100.902 77,110.314 C4.1
  Bottom Layer w0.762: 57.223,33.665 57.317,33.759 57.317,36.329 57.945,36.956 59.403,36.956 v1(59.5,37.054) ; U4.4 74.469,122.305 74.469,113.155 C4.1 79.894,113 R16.2
Servo_7: "Servo 7.1" C6.1 R24.2 U6.4 | length 41.1
  Bottom Layer w0.762: 64.34,33.664 64.34,36.73 67.412,39.802 73.215,39.802 74.314,40.901 C6.1 ; U6.4 74.469,51.305 74.469,43.155 C6.1 ; R24.2 78.935,43 C6.1
Servo_8: "Servo 8.1" C8.1 R32.2 U8.4 | length 62.1
  Top Layer w0.762: C8.1 71.5,63.186 71.5,40 74,37.5 v1(76.5,37.5)
  Bottom Layer w0.762: 72.124,33.665 72.397,33.939 74.283,33.939 76.5,36.156 v1(76.5,37.5) ; U8.4 74.469,73.305 74.469,66.155 C8.1 81.894,66 R32.2
"VCC  (SENSOR)": 
VCC_8V: "Servo 1.2" "Servo 2.2" "Servo 3.2" "Servo 4.2" "Servo 5.2" "Servo 6.2" "Servo 7.2" "Servo 8.2" pad.2 Power_1.1 R2.2 R4.2 R10.2 R12.2 R18.2 R20.2 R27.2 R28.2 | length 353.6
  Top Layer w1.524: R2.2 33.5,126.767 33.5,108.393 R10.2 34.056,102.323 34.056,83.837 R18.2 34.417,78.683 34.417,61.477 R27.2 39.5,61.766 39.5,63.493 41.007,65 43.933,65 47,61.933 47,57.5 40,50.5 pad.2 ; 38.4,31.125 38.497,31.222 ; v1(68.706,37) 68.706,27.058 70.264,25.5 74.303,25.5 83.172,34.37 83.172,55.721 R20.2 79.814,61.814 83.5,65.5 83.5,77.394 R28.2 79.814,87.793 71.5,96.106 71.5,116 72.5,117 76.627,117 79.814,113.814 ; R4.2 79.814,113.814 ; R12.2 83,126.894 83,117 80.588,114.588 79.814,113.814
  Bottom Layer w1.524: Power_1.1 19.044,30 20.168,31.125 24.718,31.125 31.527,31.125 ; 31.527,31.125 38.4,31.125 38.433,31.092 44.899,31.092 44.933,31.059 44.946,31.072 ; pad.2 44.116,40.587 47.963,36.739 47.963,32.677 49.554,31.086 ; 45.03,31.156 44.946,31.072 ; 64.34,31.125 57.224,31.125 57.204,31.106 50.919,31.106 50.899,31.086 50.886,31.072 44.946,31.072 ; 64.341,31.125 68.272,31.125 ; v1(68.706,37) 68.706,32.566 68.272,32.132 68.272,31.125 ; 72.123,31.125 68.272,31.125
VCC_uC: "Servo Sensor 1.2" "Servo Sensor 2.2" "Servo Sensor 3.2" "Servo Sensor 4.2" "Servo Sensor 5.2" "Servo Sensor 6.2" "Servo Sensor 7.2" "Servo Sensor 8.2" PWM_Servos_Sensor_uC1.9 PWM_Servos_uC1.9 R1.2 R3.2 R9.2 R11.2 R17.2 R19.2 R25.2 R26.2 | length 431.1
  Top Layer w1: v1(19.925,19.645) 11.759,19.645 6.435,24.969 6.435,51.823 7.612,53 13.331,53 16.814,56.482 R25.2 14.155,61.739 10.761,61.739 7,65.5 7,72 11,76 14.857,76 16.814,77.957 R17.2 16.814,82.389 21,86.575 21,100.894 R9.2 20,108.266 20,126.894 R1.2 20.734,134 45.58,134 50.5,129.08 50.5,125 ; 24.455,12 24.581,12 ; R3.2 52.5,96.766 52.5,87 55.5,84 57.894,84 R26.2 64.34,77.553 64.34,62.607 R19.2 55.234,53.5 51.899,53.5 50.5,54.899 50.5,63.394 47,66.894 47,121.5 50.5,125 ; R11.2 55.733,125 50.5,125
  Bottom Layer w1: v1(19.925,19.645) 19.925,13.575 21.5,12 24.581,12 24.584,11.997 32.034,11.997 32.037,11.994 32.04,11.997 38.607,11.997 38.61,12 38.613,11.997 44.895,11.997 44.898,11.994 44.915,12.011 51.092,12.011 51.109,12.028 51.148,12.067 57.433,12.067 64.55,12.066 64.586,12.03 72.805,12.03 72.841,11.994 79.809,11.994 PWM_Servos_Sensor_uC1.9 ; PWM_Servos_uC1.9 58.533,132.36 R11.2
pads on no net: U1.3 U1.6 U2.3 U2.6 U3.3 U3.6 U4.3 U4.6 U5.3 U5.6 U6.3 U6.6 U7.3 U7.6 U8.3 U8.6

## Polygon pours and split planes (outlines as drawn)
no net on My_Negativ_Layer (solid): 3.5,148.5 100.5,148.5 100.5,0 3.5,0
no net on Top Layer "Top Layer-No Net" (solid, pour order 6): 3.5,148.5 100.5,148.5 100.5,0 3.5,0
no net on Bottom Layer "Bottom Layer-No Net" (solid, pour order 4): 3.5,148.5 100.5,148.5 100.5,0 3.5,0

## Other copper
Top Layer:
  text "Lightweight Robot Arm v2.0" at 114,110 h2 r270

## Dimensions
101.5,150 to 100.5,0 on Top Overlay
100.5,149 to 3.5,149 on Top Overlay

## Text inside footprints (layer, text, board x,y; h text height)
PWM_Servos_Sensor_uC1: Top Overlay "2" at 89.53,31.925 h1.02 r270; Top Overlay "10" at 89.53,18.325 h1.02 r270; Top Overlay "1" at 86.93,31.625 h1.02 r270; Top Overlay "9" at 86.99,18.325 h1.02 r270
PWM_Servos_uC1: Top Overlay "2" at 46.253,140.53 h1.02; Top Overlay "10" at 59.853,140.53 h1.02; Top Overlay "1" at 46.553,137.93 h1.02; Top Overlay "9" at 59.853,137.99 h1.02